# EAGLE board IBM-assignment-1 (EAGLE 9.7.0)

Size 176.58 x 118.57 mm. Coordinates in mm from the lower left corner, seen from the top.
Outline: 0,0 176.58,0 176.58,118.57 0,118.57 0,0
Copper layers (1*16): Top 0.035mm / dielectric 1.5mm / Bottom 0.035mm
Design rules "default": minimum track width 6mil, minimum drill 0.35mm, track to track 6mil, track to pad 6mil, pad to pad 6mil, via to via 6mil, smd to smd 6mil, copper to edge 40mil, drill to drill 6mil, minimum pad ring 10mil, minimum via ring 8mil, stop-mask expansion 4mil, vias tented up to drill 0mil, thermal gap 10mil

## Footprints (pad centres in the part's own frame; a part is rotated, then mirrored left to right if it is on the bottom)
LEDRD254W60D565H860B = drill 0.981 pad 1.581: 1 -1.27,0; 2 1.27,0
LEDRD254W60D565H860B_G = drill 0.981 pad 1.581: 1 -1.27,0; 2 1.27,0
LEDRD254W60D565H860B_Y = drill 0.981 pad 1.581: 1 -1.27,0; 2 1.27,0
LED-RGB-5MM = drill 0.9: B 0.635,0.635; C -0.635,-0.635; G 1.905,-0.635; R -1.905,0.635
PIEZO = drill 1 pad 1.6: 1 -3.5,0; 2 3.5,0
28027 = drill 1.016 long: 1 -2.54,0; 2 0,0; 3 2.54,0
RESAD1016W63L850D250B = drill 0.83 pad 1.43: 1 -5.08,0; 2 5.08,0
SW-200D = drill 0.85 pad 1.45: 1 -7.15,0; 2 7.15,0
TO92 = drill 0.813 octagon: 1 -1.27,0; 2 0,1.905; 3 1.27,0
ARDUINO-UNO-R3-SHIELD = drill 1.016 pad 1.88: 3.3V 24.13,-2.54; 5V 24.13,0; A0 24.13,12.7; A1 24.13,15.24; A2 24.13,17.78; A3 24.13,20.32; A4 24.13,22.86; A5 24.13,25.4; AREF -24.13,-13.97; D2 -24.13,20.32; D3 -24.13,17.78; D4 -24.13,15.24; D5 -24.13,12.7; D6 -24.13,10.16; D7 -24.13,7.62; D8 -24.13,3.81; D9 -24.13,1.27; D10 -24.13,-1.27; D11 -24.13,-3.81; D12 -24.13,-6.35; D13 -24.13,-8.89; GND@0 24.13,2.54; GND@1 24.13,5.08; GND@2 -24.13,-11.43; IOREF 24.13,-7.62; NC 24.13,-10.16; RES 24.13,-5.08; RX -24.13,25.4; SCL -24.13,-19.05; SDA -24.13,-16.51; TX -24.13,22.86; VIN 24.13,7.62

## Placement (x,y rotation side)
D1  RED  [LEDRD254W60D565H860B]  62.76,107.06 180 top
D2  GREEN  [LEDRD254W60D565H860B_G]  83.08,107.06 180 top
D3  YELLOW  [LEDRD254W60D565H860B_Y]  72.92,107.06 180 top
D4  LED-RGBRCBG-PTH  [LED-RGB-5MM]  116.1,104.52 0 top
PIEZO2  PIEZO  [PIEZO]  103.16,29.16 270 top
PIR1  PIR-SENSOR_28027  [28027]  155.63,92.13 0 top
R1  1k  [RESAD1016W63L850D250B]  84.35,94.36 90 top
R2  1k  [RESAD1016W63L850D250B]  74.19,94.36 90 top
R3  1k  [RESAD1016W63L850D250B]  64.03,94.36 90 top
R4  300  [RESAD1016W63L850D250B]  96.06,45.96 90 top
R5  300  [RESAD1016W63L850D250B]  107.21,109.6 90 top
R6  300  [RESAD1016W63L850D250B]  119.91,94.36 90 top
R7  300  [RESAD1016W63L850D250B]  117.37,94.36 90 top
R8  300  [RESAD1016W63L850D250B]  112.29,94.36 90 top
TILT1  TILT  [SW-200D]  107.21,93.09 270 top
U1  TMP36GT9Z_TO92  [TO92]  94.51,86.74 0 top
U2  ARDUINO-UNO-R3-SHIELD  [ARDUINO-UNO-R3-SHIELD]  47.88,29.84 270 top

## Library data of the parts
D1 = Tinkercad; CATEGORY: Opto-Electronic; SUB-CATEGORY: LED; VALUE: LED_RED
D2 = Tinkercad; CATEGORY: Opto-Electronic; SUB-CATEGORY: LED; VALUE: LED_GREEN
D3 = Tinkercad; CATEGORY: Opto-Electronic; SUB-CATEGORY: LED; VALUE: LED_YELLOW
D4 PIEZO2 PIR1 R1-R8 TILT1 U1 U2 = Tinkercad

## Nets
D1_A: D1.1 R3.2
D2_A: D2.1 R1.2
D3_A: D3.1 R2.2
D4_B: D4.B R7.2
D4_G: D4.G R6.2
D4_R: D4.R R8.2
PIEZO2_1: PIEZO2.1 R4.1
U2_5V: PIR1.2 R5.2 U1.3 U2.5V
U2_A0: U1.2 U2.A0
U2_D2: PIR1.1 U2.D2
U2_D3: R4.2 U2.D3
U2_D4: R1.1 U2.D4
U2_D5: R2.1 U2.D5
U2_D6: R3.1 U2.D6
U2_D9: R6.1 U2.D9
U2_D10: R7.1 U2.D10
U2_D11: R8.1 U2.D11
U2_D12: R5.1 TILT1.1 U2.D12
U2_GND: D1.2 D2.2 D3.2 D4.C PIEZO2.2 PIR1.3 TILT1.2 U1.1 U2.GND@0 U2.GND@1 U2.GND@2

## Tracks (layer width: path | path; a pad name or v marks a point on that pad's centre or on a via)
D1_A  (1 unrouted)
D2_A  (1 unrouted)
D3_A  (1 unrouted)
D4_B  (1 unrouted)
D4_G  (1 unrouted)
D4_R  (1 unrouted)
PIEZO2_1  (1 unrouted)
U2_5V  (3 unrouted)
U2_A0  (1 unrouted)
U2_D2  (1 unrouted)
U2_D3  (1 unrouted)
U2_D4  (1 unrouted)
U2_D5  (1 unrouted)
U2_D6  (1 unrouted)
U2_D9  (1 unrouted)
U2_D10  (1 unrouted)
U2_D11  (1 unrouted)
U2_D12  (2 unrouted)
U2_GND  (10 unrouted)